# Altium PCB HX711.PcbDoc
Units mil, origin at the board's own origin, x right, y up, seen from the top; angles counter-clockwise.
Board outline 2362.2 x 1181.1 mil, 2 copper layers (Top Layer, Bottom Layer); 34 components, 55 nets, 123 pads, 8 vias.
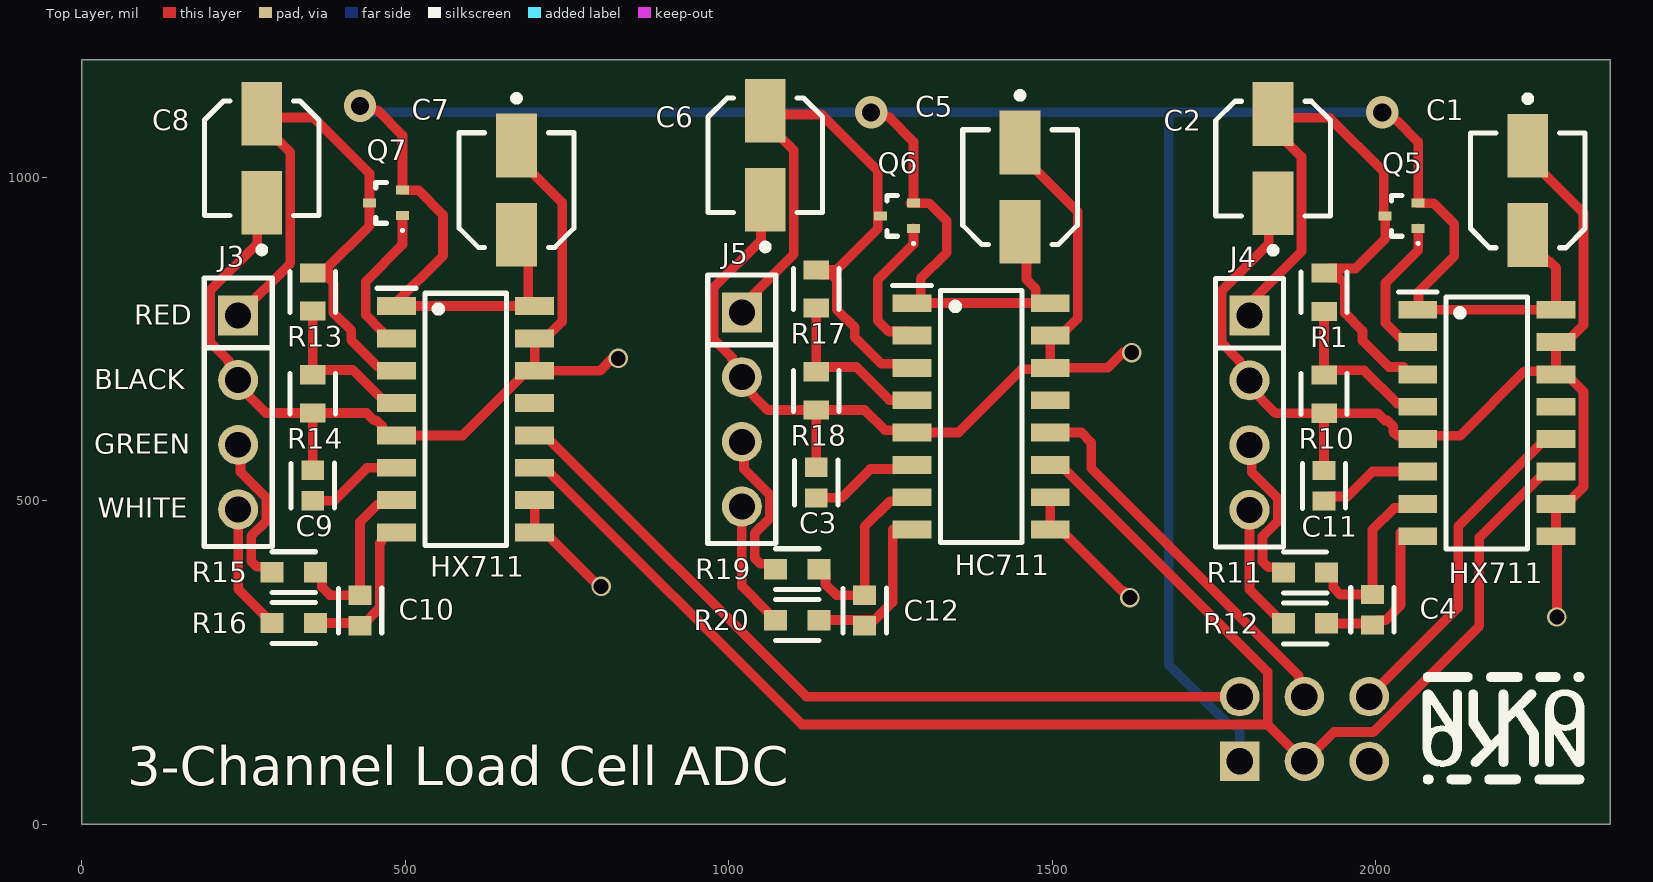
[diagram p0: Top Layer view]
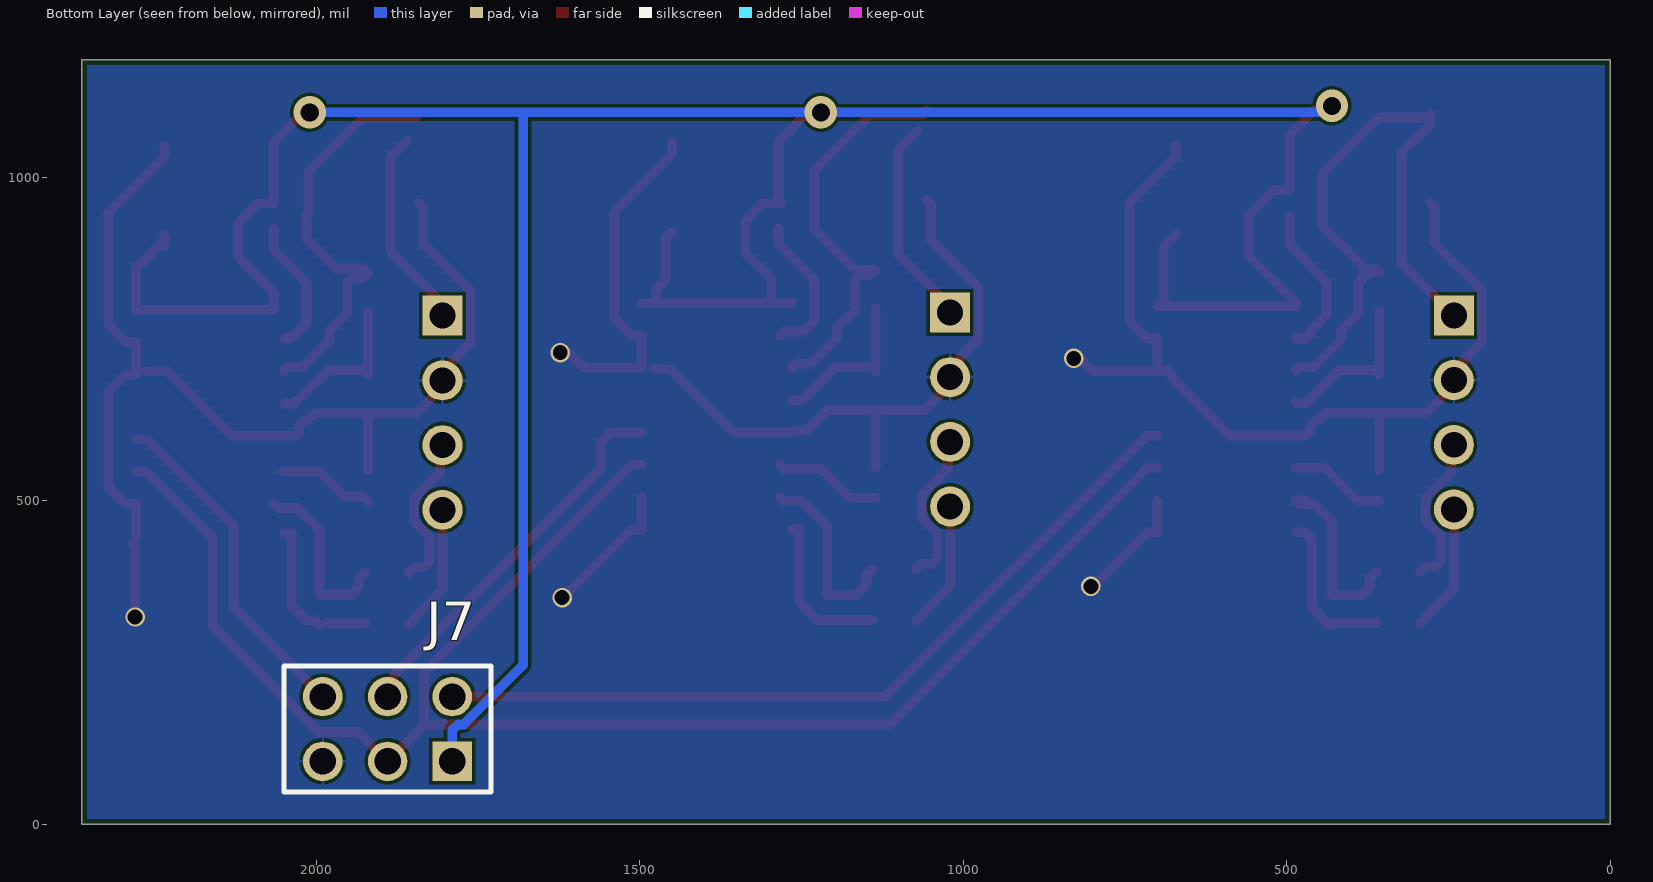
[diagram p1: Bottom Layer view, seen from below]
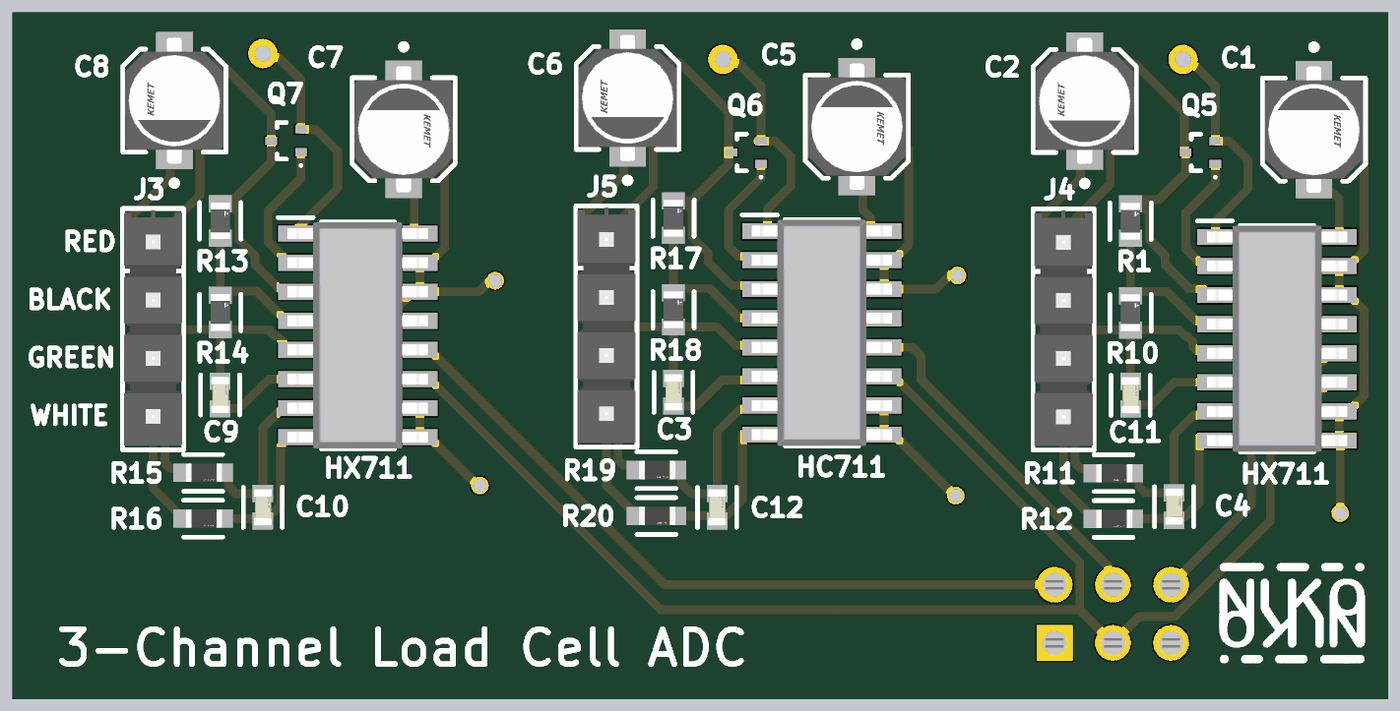
[diagram p2: 3D render of the assembled board from above, using the file's embedded part models]

## Layer stack, top to bottom
Top Solder: solder mask 0.4, Solder Resist, Dk 3.5
Top Layer: signal copper 1.4
Dielectric 1: dielectric 12.6, FR-4, Dk 4.8
Bottom Layer: signal copper 1.4
Bottom Solder: solder mask 0.4, Solder Resist, Dk 3.5

## Board outline
2362.2,0 0,0 0,1181.1 2362.2,1181.1

## Design rules (kind name [scope] priority, off if disabled: settings)
BoardOutlineClearance [All] p1: gap=7.87 ignorepadtopadclearanceinfootprint=FALSE
Clearance [All] p1: gap=5 ignorepadtopadclearanceinfootprint=FALSE except(9.84: Arc-Hole Track-Hole SMDPad-Hole THPad-Hole Via-Hole Fill-Hole Poly-Hole Region-Hole Text-Hole)
ComponentClearance [All] p1: gap=5 collisioncheckmode=3 verticalgap=5 showdistances=TRUE
DiffPairsRouting [All] p1: maxlimit=10 minlimit=5 mostfreqgap=5 toplayer_minwidth=5 toplayer_maxwidth=1000 toplayer_prefwidth=5 bottomlayer_minwidth=5 bottomlayer_maxwidth=1000 bottomlayer_prefwidth=5 maxuncoupledlength=500
Height [All] p1: minheight=0 maxheight=71497.94 prefheight=500
HoleSize [All] p1: absolutevalues=TRUE maxlimit=248.03 minlimit=11.81 maxpercent=80.000 minpercent=20.000
HoleToHoleClearance [All] p1: gap=9.84 allowstackedmicrovias=FALSE
MinimumAnnularRing [All] p1: minimumring=3
MinimumSolderMaskSliver [All] p1: minsoldermaskwidth=0
PlaneClearance [All] p1: clearance=5
PlaneConnect PlaneConnectPowerPads [InPadClass('PowerPads')] p1: planeconnectstyle=Direct reliefexpansion=20 reliefentries=4 reliefconductorwidth=10 reliefairgap=10
PlaneConnect [All] p2: pad.planeconnectstyle=Relief pad.reliefexpansion=11.81 pad.reliefentries=4 pad.reliefconductorwidth=5 pad.reliefairgap=5 via.planeconnectstyle=Direct via.reliefexpansion=11.81 via.reliefentries=4 via.reliefconductorwidth=5 via.reliefairgap=5
PolygonConnect PolygonConnectPowerPads [All vs (InPadClass('PowerPads'))] p1: connectstyle=Direct reliefconductorwidth=10 reliefentries=4 polygonreliefangle="90 Angle" airgapwidth=10
PolygonConnect [All] p2: thpad.connectstyle=Relief thpad.reliefconductorwidth=5 thpad.reliefentries=4 thpad.polygonreliefangle="90 Angle" thpad.airgapwidth=5 smdpad.connectstyle=Relief smdpad.reliefconductorwidth=5 smdpad.reliefentries=4 smdpad.polygonreliefangle="90 Angle" smdpad.airgapwidth=5 via.connectstyle=Direct via.reliefconductorwidth=5 via.reliefentries=4 via.polygonreliefangle="90 Angle" via.airgapwidth=5
RoutingVias [All] p1: holewidth=11.81 width=23.62 viastyle="Through Hole" minholewidth=11.81 minwidth=23.62 maxholewidth=23.62 maxwidth=259.84
SilkToSilkClearance [All] p1: silktosilkclearance=0
SilkToSolderMaskClearance [IsPad] p1: minsilkscreentomaskgap=5 clearancetoexposedcopper=TRUE
SolderMaskExpansion [All] p1: expansion=2.95 istentingtop=FALSE
SupplyNets "Schematic Supply Nets" [InNet('Pump +')] p1: voltage=0.000
SupplyNets "Schematic Supply Nets_1" [InNet('GND')] p2: voltage=0.000
SupplyNets "Schematic Supply Nets_4" [InNet('5V')] p3: voltage=0.000
SupplyNets "Schematic Supply Nets_3" [InNet('3V3')] p4: voltage=0.000
Width [All] p1: maxlimit=1000 minlimit=5 preferedwidth=5 minimp=50.000000 maximp=50.000000 favimp=50.000000
20 further rules are at their usual default settings.

## Classes and differential pairs
component class Main: J7
component class Designator: C1 C2 C3 C4 HX711 J4 R1 R10 R11 R12

## Components (designator, comment, footprint, x,y, rotation, side; value= is the part's Value field where it differs from the comment)
C1 "EDK106M035A9BAA" FP-EDK9B-MFG 2234.96,979.33 r270 top value=10uF
C2 "EDK106M035A9BAA" FP-EDK9B-MFG 1841.26,1028.54 r90 top value=10uF
C3 "C0603C104K3RAC7411" FP-C0603C-CF-MFG 1135.16,527.8 r270 top value="0.10 μF"
C4 "C0603C104K3RAC7411" FP-C0603C-CF-MFG 1994.84,331.22 r270 top value="0.10 μF"
C5 "EDK106M035A9BAA" FP-EDK9B-MFG 1450.12,984.49 r270 top value=10uF
C6 "EDK106M035A9BAA" FP-EDK9B-MFG 1056.42,1033.7 r90 top value=10uF
C7 "EDK106M035A9BAA" FP-EDK9B-MFG 671.81,979.88 r270 top value=10uF
C8 "EDK106M035A9BAA" FP-EDK9B-MFG 278.11,1029.09 r90 top value=10uF
C9 "C0603C104K3RAC7411" FP-C0603C-CF-MFG 356.85,523.19 r270 top value="0.10 μF"
C10 "C0603C104K3RAC7411" FP-C0603C-CF-MFG 430,330 r270 top value="0.10 μF"
C11 "C0603C104K3RAC7411" FP-C0603C-CF-MFG 1920,522.64 r270 top value="0.10 μF"
C12 "C0603C104K3RAC7411" FP-C0603C-CF-MFG 1210,330 r270 top value="0.10 μF"
HC711 "HX711" SOIC127P600X160-16N 1390,630 r0 top (schematic designator HC711_3)
HX711 "HX711" SOIC127P600X160-16N 593.07,625.55 r0 top (schematic designator HX711_1)
HX711 "HX711" SOIC127P600X160-16N 2171.61,619.84 r0 top (schematic designator HX711_2)
J3 "TSW-104-23-T-S" FP-TSW-104-23-T-S-MFG 241.69,636.18 r270 top
J4 "TSW-104-23-T-S" FP-TSW-104-23-T-S-MFG 1804.84,635.63 r270 top
J5 "TSW-104-23-T-S" FP-TSW-104-23-T-S-MFG 1020,640.79 r270 top
J7 "SSW-103-01-L-D" SMTC-SSW-103-01-X-D 1789.76,96.85 r0 bottom
Q5 "MMBT3906TT1G" ONSC-SC-75-3-463-01_V 2040,940 r180 top
Q6 "MMBT3906TT1G" ONSC-SC-75-3-463-01_V 1260,940 r180 top
Q7 "MMBT3906TT1G" ONSC-SC-75-3-463-01_V 470,960 r180 top
R1 "CRCW060320K0FKEAHP" FP-CRCW0603-HPe3-MFG 1920,821.85 r90 top
R10 "CRCW060320K0FKEAHP" FP-CRCW0603-HPe3-MFG 1920,664.37 r90 top
R11 "RT0603FRE07100RL" FP-RT0603-MFG 1890.62,388.78 r0 top value=100Ω
R12 "RT0603FRE07100RL" FP-RT0603-MFG 1890.62,310.04 r0 top value=100Ω
R13 "CRCW060320K0FKEAHP" FP-CRCW0603-HPe3-MFG 356.85,822.4 r90 top
R14 "CRCW060320K0FKEAHP" FP-CRCW0603-HPe3-MFG 356.85,664.92 r90 top
R15 "RT0603FRE07100RL" FP-RT0603-MFG 327.47,389.33 r0 top value=100Ω
R16 "RT0603FRE07100RL" FP-RT0603-MFG 327.47,310.59 r0 top value=100Ω
R17 "CRCW060320K0FKEAHP" FP-CRCW0603-HPe3-MFG 1135.16,827.01 r90 top
R18 "CRCW060320K0FKEAHP" FP-CRCW0603-HPe3-MFG 1135.16,669.53 r90 top
R19 "RT0603FRE07100RL" FP-RT0603-MFG 1105.77,393.94 r0 top value=100Ω
R20 "RT0603FRE07100RL" FP-RT0603-MFG 1105.77,315.2 r0 top value=100Ω

## Footprints (in the part's own frame and the unit in brackets; to place one, negate y for a bottom-side part, rotate by r counter-clockwise, add the part's x,y. Pads: shape width x height; smd on the part's side, far side on the other; paste and mask are expansions set on the pad)
FP-C0603C-CF-MFG [mm]
  rect 0.75x0.9 smd paste+0 mask+0: 1(-0.6,0) 2(0.6,0)
  silkscreen extent -0.87,-0.85 0.88,0.85, body extent -1.2,-0.6 1.2,0.6, height 0.25
FP-CRCW0603-HPe3-MFG [mm]
  rect 0.75x1 smd paste+0 mask+0: 1(-0.75,0) 2(0.75,0)
  silkscreen extent -0.8,-0.9 0.8,0.9, body extent -1.22,-0.6 1.22,0.6, height 0.25
FP-EDK9B-MFG [mm]
  rect 2.5x1.6 smd paste+0 mask+0: 1(-1.75,0) 2(1.75,0)
  silkscreen extent -3.72,-2.25 2.25,2.25, body extent -3.25,-2.5 3.25,2.5, height 0.25
FP-RT0603-MFG [mm]
  rect 0.9x0.8 smd paste+0 mask+0: 1(-0.85,0) 2(0.85,0)
  silkscreen extent -0.85,-0.81 0.86,0.8, body extent -1.4,-0.55 1.4,0.55, height 0.25
FP-TSW-104-23-T-S-MFG [mm]
  rect 1.57x1.57 hole 1.02 paste-2539.97 mask+0: 1(-3.81,0)
  round 1.57 hole 1.02 paste-2539.97 mask+0: 2(-1.27,0) 3(1.27,0) 4(3.81,0)
  silkscreen extent -5.27,-1.34 5.27,1.34, body extent -5.37,-1.44 5.37,1.44, height 0.25
ONSC-SC-75-3-463-01_V [mil] "SOT23, 3-Leads, Body 1.6x0.8mm, Pitch 0.5mm"
  rect 20x14.02 smd: 1(-25.49,19.68) 2(-25.49,-19.69) 3(25.49,0)
  silkscreen extent -27,-31 16,44, body extent -16,-31 16,31, height 35
SMTC-SSW-103-01-X-D [mm] "SQ Post Socket, 2x3 Pins, Vertical, 2.54mm Pitch, Female"
  rect 1.55x1.55 hole 1.04: 1(0,0)
  round 1.55 hole 1.04: 2(0,-2.54) 3(2.54,0) 4(2.54,-2.54) 5(5.08,0) 6(5.08,-2.54)
  silkscreen extent -1.53,-3.74 6.61,1.2, body extent -1.52,-3.75 6.6,1.21, height 8.51
SOIC127P600X160-16N [mm]
  rect 1.525x0.7 smd: 1(-2.712,4.445) 2(-2.712,3.175) 3(-2.712,1.905) 4(-2.712,0.635) 5(-2.712,-0.635) 6(-2.712,-1.905) 7(-2.712,-3.175) 8(-2.712,-4.445) 9(2.712,-4.445) 10(2.712,-3.175) 11(2.712,-1.905) 12(2.712,-0.635) 13(2.712,0.635) 14(2.712,1.905) 15(2.712,3.175) 16(2.712,4.445)
  silkscreen extent -3.47,-4.95 1.6,5.15, body extent -3.06,-4.94 3.06,4.94, height 2.05

## Part data
C1 C2 C5 C6 C7 C8: library part CMP-03015-000003-1, "CAP ALUM 10UF 20% 35V SMD", Capacitance=10uF, Leakage Current=3.5uA, Manufacturer=Kemet, Package=EDK9B, Ripple Current=24mA, Temperature="-40°C to +85°C", Temperature Range High=+85°C, Temperature Range Low=-40°C, Tolerance=20%, Voltage Rating=35V, Automotive=No, Category=Cap, ComponentLink2Description=Datasheet, ComponentLink2URL=https://content.kemet.com/datasheets/KEM_A4001_EDK.pdf, Device Class L1="Passive Components", Device Class L2=Capacitors, Device Class L3="Aluminum Electrolytic Capacitors", Digikey Description="CAP ALUM 10UF 20% 35V SMD", Dissipation Factor=16%, Footprint Url=http://www.kemet.com/Lists/FileStore/smd_radial_ordering_codes_tech.pdf, Height=5.65mm, Lead Free=Yes, Life=2000Hours, Manufacturer Part Number=EDK106M035A9BAA, Material=Aluminum, Octopart=https://octopart.com/edk106m035a9baa-kemet-26722193, RoHS=TRUE
C3 C4 C9 C10 C11 C12: library part CMP-2006-02291-2, "CAP CER 0.1UF 25V X7R 0603", Capacitance="0.10 μF", Manufacturer=KEMET, Package=C0603C-CF, Temperature="-55°C to +125°C", Temperature Characteristic=X7R, Temperature Coefficient=30ppm/°C, Temperature Range High=+125°C, Temperature Range Low=-55°C, Tolerance=0.1, Voltage Rating="25 V", Automotive=Yes, Automotive Grade="Grade 1", Category=Cap, ComponentLink2Description=Datasheet, ComponentLink2URL=https://api.kemet.com/component-edge/download/datasheet/C0603C100J5GACAUTO.pdf, Device Class L1="Passive Components", Device Class L2=Capacitors, Device Class L3="Ceramic Capacitors", Digikey Description="CAP CER 0.1UF 25V X7R 0603", Height=0.87mm, Lead Free=Yes, Manufacturer Part Number=C0603C104K3RAC7411, Material=Ceramic, Mouser Description="Multilayer Ceramic Capacitors MLCC - SMD/SMT 25volts 0.1uF X7R 10%", Octopart=https://octopart.com/c0603c104k3rac7411-kemet-9138804, RoHS=TRUE
HC711 HX711 HX711: "Integrated Circuit", Manufacturer_Name=AVIA, Datasheet Link=https://cdn.sparkfun.com/datasheets/Sensors/ForceFlex/hx711_english.pdf, Height=1.6mm, Manufacturer_Part_Number=HX711
J3 J4 J5: library part CMP-02766-001388-1, "CONN HEADER VERT 4POS 2.54MM", Color=Black, Max Current Rating=7.6A, Max Operating Temperature=105°C, Max Voltage Rating (AC)=550V, Min Operating Temperature=-55°C, Package Quantity=1, Connector Type="Male Pin", Contact Material=Bronze, Contact Mating Length=0.23inch, Contact Plating=Tin, Contact Type="Male Pin", Depth=2.54mm, Gender=Male, Housing Color=Black, Housing Material=Polyester, Lead Free="Lead Free", Length=10.16mm, Mount="Through Hole", Number of Contacts=4, Number of Positions=4, Number of Rows=1, Orientation=Straight, Packaging=Bulk, Pitch=2.54mm, Radiation Hardening=No, REACH SVHC="No SVHC", RoHS Compliant=Yes, Series=TSW, Termination=Solder, Width=2.54mm
J7: library part CMP-1023-00330-1, "SQ Post Socket, Through-hole, Vertical, -55 to 125 degC, 2.54 mm Pitch, 6-Pin, Female, RoHS", Manufacturer=Samtec, Temperature Range="-55 to 125 degC", ComponentLink1Description="Manufacturer URL", ComponentLink1URL=http://www.samtec.com, ComponentLink2Description=Datasheet, ComponentLink2URL=http://www.samtec.com/documents/webfiles/pdf/SSW_TH.PDF, ComponentLink3Description="Package Specification", ComponentLink3URL=http://www.samtec.com/documents/webfiles/cpdf/SSW-1XX-XX-XXX-X-XX-XXX-XX-MKT.pdf, DatasheetVersion=F-214, Mounting Technology=Through-hole, Orientation=Vertical, PackageDescription="Assembly, Socket Strip .016 X .031 Tail", PackageReference=SSW-103-01-X-D, PackageVersion="CA, 6/1987", PartNumber=SSW-103-01-L-D, Pitch="2.54 mm", RoHS=True
Q5 Q6 Q7: library part CMP-1048-00413-1, "General Purpose Transistor, PNP Silicon, 3-Pin SC-75, Pb-Free, Tape and Reel", Manufacturer="On Semiconductor", ComponentLink1Description="Manufacturer URL", ComponentLink1URL=http://www.onsemi.com/, ComponentLink2Description=Datasheet, ComponentLink2URL=http://www.onsemi.cn/pub_link/Collateral/MMBT3906TT1-D.PDF, ComponentLink3Description="Package Specification", ComponentLink3URL=http://www.onsemi.com/pub_link/Collateral/463-01.PDF, DatasheetVersion="Rev. 1", fT Min (MHz)=250, IC Continuous (A)=-0.2, Mounting Technology="Surface Mount", PackageDescription="3-Pin Small Outline Transistor, Body 1.6 x 0.8 mm, Pitch 0.5 mm", PackageReference=SC-75-3-463-01, PackageVersion="Rev. F, 07/2005", Packing="Tape and Reel", PartNumber=MMBT3906TT1G, Polarity=PNP, RoHS=TRUE
R1 R10 R13 R14 R17 R18: library part CMP-02407-007301-1, "RES Thick Film, 20kΩ, 1%, 0.33W, 100ppm/°C, 0603", Case Code (Imperial)=0603, Case Code (Metric)=1608, Max Operating Temperature=155°C, Max Power Dissipation=250mW, Min Operating Temperature=-55°C, Package Quantity=10, Resistance=20kR, Temperature Coefficient=100ppm/°C, Tolerance=1%, Voltage Rating=75V, Case/Package=0603, Composition="Thick Film", Contact Plating=Tin, Depth=0.85mm, Features="Automotive AEC-Q200", Height=0.45mm, Lead Free="Lead Free", Length=1.6mm, Mount="Surface Mount", Number of Terminations=2, Packaging="Tape and Reel", Power Rating=250mW, Radiation Hardening=No, Termination=SMD/SMT, Weight=7.1E-05oz, Width=0.033inch
R11 R12 R15 R16 R19 R20: library part CMP-03412-022806-1, "RES SMD 100 OHM 1% 1/10W 0603", Manufacturer=Yageo, Package=RT0603, Power Rating=0.1W, Resistance=100Ω, Temperature="-55°C to +155°C", Temperature Coefficient="50 ppm/°C", Temperature Range High=+155°C, Temperature Range Low=-55°C, Tolerance=0.01, Voltage Rating=75V, Automotive=No, Category=Res, ComponentLink2Description=Datasheet, ComponentLink2URL=http://www.yageo.com/documents/recent/PYu-RT_1-to-0.01_RoHS_L_9.pdf, Composition="Thin Film", Device Class L1="Passive Components", Device Class L2=Resistors, Device Class L3="Chip SMD Resistors", Digikey Description="RES SMD 100 OHM 1% 1/10W 0603", Footprint Url=http://www.yageo.com/exep/pages/download/literatures/PYu-R_Mount_10.pdf, Height=0.55mm, Ipc Land Pattern Name=RESC16080X45, Lead Free=Yes, Manufacturer Part Number=RT0603FRE07100RL, Mouser Description="Thin Film Resistors - SMD 1/10W 100 ohm 1% 50ppm", Octopart=https://octopart.com/rt0603fre07100rl-yageo-39792638, RoHS=TRUE, Series=RT

## Via types
v1: diameter 30, hole 23, Top Layer to Bottom Layer, 5 vias
v2: diameter 50, hole 28, Top Layer to Bottom Layer, 3 vias

## Nets (pads, with @x,y where several pads share a name; then routed paths per layer and width w, separated by ;. In a path a pad name is that pad's centre, name@x,y a point inside that pad or via, vN(x,y) a via of type N, cw(c..) or ccw(c..) an arc to the next point about the centre after c; other vN are vias at no path point)
3V3: 
5V: C1.2 C5.2 C7.2 HC711.1 HC711.16 HX711.1 HX711.16 J7.1 Q5.2 Q6.2 Q7.2 | length 4890.5
  Top Layer w15: v2(430,1110) 436.7,1103.3 456.7,1103.3 495.49,1064.51 Q7.2 520.32,979.69 558.33,941.67 558.33,878.25 HX711.1@483.46,803.39 ; HX711.1@486.3,800.55 HX711.16@696.28,800.55 ; C7.2 690,892.8 690,806.83 HX711.16@696.28,800.55 ; HX711.16@699.84,800.55 HX711.16@696.28,800.55 ; v2(1220,1100) 1226.7,1093.3 1246.7,1093.3 1285.49,1054.51 Q6.2 1280.19,959.69 1309.53,959.68 1336.63,932.58 1336.63,882.85 1296.57,842.79 HC711.1@1296.57,805.16 ; HC711.1@1264.61,805.16 HC711.1@1296.57,805.16 ; C5.2 1460,905.71 1460,841.77 1474.25,827.52 1474.25,811.28 1480.53,805 HC711.16 ; HC711.16@1478.15,805.16 HC711.1@1296.57,805.16 ; v2(2010,1100) 2019.47,1100 2033.06,1086.41 2033.59,1086.41 2065.49,1054.51 Q5.2 2089.21,959.69 2121.48,927.42 2121.48,877.7 2066.12,822.34 2066.12,801.12 HX711.1@2064.99,800 ; HX711.1@2064.84,794.84 2278.39,794.84 2278.39,859.93 2269.6,868.72 2267.81,868.72 C1.2@2234.96,901.57 ; C1.2@2234.96,892.72 C1.2@2234.96,901.57 ; C1.2 C1.2@2234.96,901.57
  Bottom Layer w15: v2(430,1110) 430,1100 v2(1220,1100) 1680,1100 ; J7.1 1789.76,145.05 1780.98,153.84 1771.95,153.84 1680,245.79 1680,1100 ; v2(2010,1100) 1680,1100
12V: 
CLK: 
GND: C1.1 C2.1 C3.1 C5.1 C6.1 C7.1 C8.1 C9.1 C11.1 HC711.5 HC711.9 HC711.10 HC711.14 HC711.15 HX711.5 HX711.9 HX711.10 HX711.14 HX711.15 J3.2 J4.2 J5.2 J7.5 R10.1 R14.1 R18.1 | length 5188.9
  Top Layer w15: C8.1 271.27,953.36 271.27,897.27 198.29,824.29 198.29,744.74 226.51,716.52 226.51,714.03 241.69,698.85 241.69,678.31 284.61,635.39 R14.1 ; C9.1 R14.1 ; C7.1 671.81,1031.06 742.36,960.51 742.36,776.83 716.08,750.55 699.84,750.55 HX711.14@699.84,700.55 ; HX711.10@699.84,500.55 699.84,450.55 716.08,450.55 v1@799.94,366.7 ; v1@830,720 820.53,720 801.08,700.55 HX711.14@699.84,700.55 ; C6.1 1049.58,957.96 1049.58,901.88 976.59,828.89 976.59,749.35 1004.82,721.13 1004.82,718.64 1020,703.45 1020,680 1060,640 R18.1 ; C3.1 R18.1 ; C5.1 1450.12,1035.67 1539.29,946.5 1539.29,781.28 1513.01,755 HC711.15 HC711.14 1585.53,705 1610.53,730 v1@1620,730 ; HC711.14@1478.15,705.16 1476.07,703.08 1453.08,703.08 1355.16,605.16 1264.61,605.16 1261.07,608.7 1241.3,608.7 1210,640 R18.1 ; HC711.10 HC711.9 1513.01,455 1608.01,360 v1@1610,360 ; C2.1 1834.42,952.81 1834.42,896.72 1761.44,823.74 1761.44,744.19 1789.66,715.97 1789.66,713.48 1804.84,698.3 1804.84,675.16 1845.16,634.84 R10.1 ; C11.1 R10.1 ; C1.1 2234.96,1030.51 2320.91,944.57 2320.91,771.12 2294.63,744.84 2278.39,744.84 2278.39,694.84 2294.63,694.84 2320.91,668.56 2320.91,521.12 2294.63,494.84 2278.39,494.84 HX711.9@2278.39,444.84 ; HX711.14@2262.99,700 2230,700 2130,600 2033.21,600 2026.93,606.28 2026.93,614.93 2018.14,623.72 2014.25,623.72 2003.13,634.84 R10.1 ; v1(2280,320) 2280,431.99 HX711.9@2283.01,435 ; R14.1 439.98,635.39 451.1,624.27 454.99,624.27 463.78,615.48 463.78,606.83 470.06,600.55 486.3,600.55 588.37,600.55 677.32,689.51 677.32,694.27 683.6,700.55 HX711.14@699.84,700.55
  other v1: 1620,350 802.68,367.36 829.09,719.59 1622.81,728.57
"Green (S+)_1": J3.3 R15.1 | length 246.9
  Top Layer w15: J3.3 245.15,582.73 245.15,544.11 285.1,504.16 285.1,468.2 261.69,444.8 261.69,406.37 270.48,397.58 285.75,397.58 R15.1
"Green (S+)_2": J4.3 R11.1 | length 242
  Top Layer w15: J4.3@1808.3,582.17 1808.3,543.56 1848.25,503.61 1848.25,467.65 1824.84,444.25 1824.84,405.81 1833.63,397.03 1848.9,397.03 R11.1
"Green (S+)_3": J5.3 R19.1 | length 246.9
  Top Layer w15: J5.3 1023.46,587.33 1023.46,548.72 1037.98,534.19 1063.41,508.77 1063.41,472.81 1040,449.4 1040,410.97 1048.79,402.19 1064.06,402.19 R19.1
HX711_1: HX711.12@699.84,600.55 J7.2 | length 1257.1
  Top Layer w15: HX711.12@699.84,600.55 716.08,600.55 1119.78,196.85 J7.2
HX711_2: HC711.12 J7.4 | length 599.2
  Top Layer w15: HC711.12 1545,605 1560,590 1560,550 1880.96,229.04 1880.96,205.66 J7.4
HX711_3: HX711.12@2278.39,594.84 J7.6 | length 527.1
  Top Layer w15: J7.6 2127.22,334.3 2127.22,459.91 2262.15,594.84 HX711.12@2278.39,594.84
Knapp_1: 
Knapp_2: 
Knapp_3: 
NetC3_2: C11.2 HX711.6@2064.84,544.84 | length 150.3
  Top Layer w15: C11.2 1927.26,506.28 1956.28,506.28 1994.84,544.84 HX711.6@2051.3,544.84
NetC4_1: C4.1 HX711.7@2064.84,494.84 R11.2 | length 280.3
  Top Layer w15: R11.2 1926.05,388.78 1934.3,380.53 1934.3,365.39 1944.84,354.84 C4.1 1994.84,454.84 2028.56,488.56 2058.56,488.56 HX711.7@2064.84,494.84
NetC4_2: C4.2 HX711.8@2064.84,444.84 R12.2 | length 239.9
  Top Layer w15: R12.2 C4.2@1984.84,310.04 ; C4.2 2002.11,314.86 2014.86,314.86 2038.11,338.11 2038.11,450 HX711.8@2049.45,450
NetC9_2: C9.2 HX711.6@486.3,550.55 | length 150.6
  Top Layer w15: C9.2 389.57,499.57 440.55,550.55 HX711.6@486.3,550.55
NetC10_1: C10.1 HX711.7@486.3,500.55 R15.2 | length 301.2
  Top Layer w15: R15.2 362.9,389.33 371.15,381.08 371.15,366.1 383.62,353.62 C10.1 430,466.77 457.5,494.27 480.02,494.27 486.3,500.55 470.06,500.55 HX711.7@463.78,494.27
NetC10_2: C10.2 HX711.8@486.3,450.55 R16.2 | length 247.6
  Top Layer w15: R16.2 C10.2@430,310.59 ; C10.2 432.95,306.38 460.22,333.64 460.22,434.19 463.78,437.76 463.78,444.27 470.39,450.88 HX711.8@485.97,450.88
NetC11_2: C3.2 HC711.6 | length 169.1
  Top Layer w15: C3.2 1174.17,504.17 1218.72,548.72 1276.95,548.72 HC711.6
NetC12_1: C12.1 HC711.7 R19.2 | length 294.6
  Top Layer w15: R19.2 1141.21,393.94 1149.46,385.69 1149.46,370.54 1166.38,353.62 C12.1 1210,460 1248.72,498.72 1276.95,498.72 HC711.7
NetC12_2: C12.2 HC711.8 R20.2 | length 248.9
  Top Layer w15: R20.2 1225.2,315.2 1253.27,343.27 1253.27,455.16 HC711.8@1264.61,455.16
NetHC711_3_2: HC711.2 Q6.1 | length 227.9
  Top Layer w15: HC711.2 1276.95,761.28 1247.01,761.28 1230,778.29 1230,841.14 1285.49,896.63 Q6.1
NetHC711_3_4: HC711.4 R17.1 R18.2 | length 252.1
  Top Layer w15: R17.1 1135.16,706.32 R18.2 1142.42,706.32 1197.2,706.32 1248.37,655.16 HC711.4@1264.61,655.16
NetHX711_1_2: HX711.2@486.3,750.55 Q7.1 | length 242.4
  Top Layer w15: HX711.2@486.3,750.55 470.06,750.55 463.78,756.83 463.78,761.59 438.9,786.47 438.9,838.9 495.49,895.49 Q7.1
NetHX711_1_4: HX711.4@486.3,650.55 R13.1 R14.2 | length 252.1
  Top Layer w15: R13.1 356.85,701.71 R14.2 364.11,701.71 418.9,701.71 470.06,650.55 HX711.4@486.3,650.55
NetHX711_2_2: HX711.2@2064.84,744.84 Q5.1 | length 211.7
  Top Layer w15: HX711.2@2049.45,750 2048.33,751.12 2038.02,751.12 2014.84,774.3 2014.84,836.06 2023.63,844.84 2023.7,844.84 2065.49,886.63 Q5.1
NetHX711_2_4: HX711.4@2064.84,644.84 R1.1 R10.2 | length 252.1
  Top Layer w15: R1.1 1920,701.16 R10.2 1927.26,701.16 1982.05,701.16 2033.21,650 HX711.4@2049.45,650
NetJ6_3: 
NetP1_3: 
NetP2_3: 
NetP3_3: 
NetP4_3: 
NetQ2_1: 
NetQ3_1: 
NetQ4_1: 
NetQ8_1: 
NetQ9_1: 
PD_SCK: HC711.11 HX711.11 J7.3 | length 2581.8
  Top Layer w15: HX711.11@699.84,550.55 716.08,550.55 1112.8,153.84 1832.78,153.84 ; HC711.11 1513.01,555 1832.78,235.24 1832.78,153.84 ; HX711.11@2278.39,544.84 2262.15,544.84 2160,442.7 2160,306.26 1996.09,142.35 1935.26,142.35 J7.3 1832.78,153.84
"Pump +": 
"Pump -": 
PWM_0: 
PWM_1: 
PWM_2: 
PWM_3: 
PWM_4: 
"RED (E+)_1": C8.2 HX711.3@486.3,700.55 J3.1 Q7.3 R13.2 | length 986
  Top Layer w15: J3.1 322.11,866.59 322.11,1037.89 303.72,1056.28 302.11,1056.28 278.11,1080.28 278.11,1092.15 C8.2 ; C8.2@283.95,1092.15 357.85,1092.15 444.51,1005.49 Q7.3 444.51,924.51 376.93,856.93 361.85,856.93 R13.2 363.11,851.93 371.93,851.93 381.93,851.93 ; 380.25,844.67 389.04,835.88 389.04,790.22 416.41,762.84 416.41,747.54 457.12,706.83 480.02,706.83 HX711.3@486.3,700.55
"RED (E+)_2": C2.2 HX711.3@2064.84,694.84 J4.1 Q5.3 R1.2 | length 995.7
  Top Layer w15: J4.1@1800,800 1885.26,885.26 1885.26,1031.21 C2.2@1860,1056.47 ; J4.1 J4.1@1827.05,807.84 ; C2.2 1847.1,1091.6 1928.4,1091.6 2012.5,1007.5 2012.5,940.49 2012.99,940 Q5.3 2014.51,904.51 1968.64,858.64 1927.26,858.64 R1.2 R1.2@1924.92,851.38 ; R1.2@1920,850.38 1926.26,844.11 1943.4,844.11 1952.18,835.33 1952.18,789.67 1979.56,762.29 1979.56,746.99 2020.27,706.28 2043.17,706.28 HX711.3@2049.45,700
"RED (E+)_3": C6.2 HC711.3 J5.1 Q6.3 R17.2 | length 988
  Top Layer w15: J5.1 1031.7,802.49 J5.1@1043.41,814.19 ; J5.1@1031.7,812.06 1100.41,880.77 1100.41,1041.21 C6.2@1070.81,1070.81 ; C6.2 1062.26,1096.76 1143.24,1096.76 1230,1010 1230,920 1166.54,856.54 1158.56,856.54 1141.42,856.54 R17.2 R17.2@1140.08,856.54 ; R17.2@1135.16,855.53 1141.42,849.27 1158.56,849.27 1167.34,840.48 1167.34,794.82 1194.71,767.45 1194.71,752.15 1235.42,711.44 1258.33,711.44 HC711.3@1264.61,705.16
SCL: 
SDA: 
"White (S-)_1": J3.4 R16.1 | length 198.4
  Top Layer w15: J3.4 241.69,362.9 283.79,320.81 283.79,318.84 292.03,310.59 R16.1
"White (S-)_2": J4.4 R12.1 | length 198.4
  Top Layer w15: J4.4 1804.84,362.35 1846.94,320.26 1846.94,318.29 1855.18,310.04 R12.1
"White (S-)_3": J5.4 R20.1 | length 198.4
  Top Layer w15: J5.4 1020,367.51 1062.09,325.41 1062.09,323.44 1070.34,315.2 R20.1
pads on no net: HC711.13 HX711.13

## Polygon pours and split planes (outlines as drawn)
GND on Bottom Layer "GND_L02_P000" (solid, pour order 0): 0,1180 0,0 2360,0 2360,1180

## Silkscreen, mask and mechanical layers (free items; w line width, h text height)
Top Overlay:
  drawing of 14 lines, arcs and shapes, not listed
  text "RED" at 81,772 h31
  text "BLACK" at 19.02,672.33 h31
  text "GREEN" at 19.02,572.67 h31
  text "WHITE" at 24.18,473 h31
  text "3-Channel Load Cell ADC" at 70,60 h60